# Altium PCB RP2040_PCB.PcbDoc
Units mil, origin at the board's own origin, x right, y up, seen from the top; angles counter-clockwise.
Board outline not stored, 2 copper layers (Top Layer, Bottom Layer); 32 components, 0 nets, 138 pads, 0 vias.
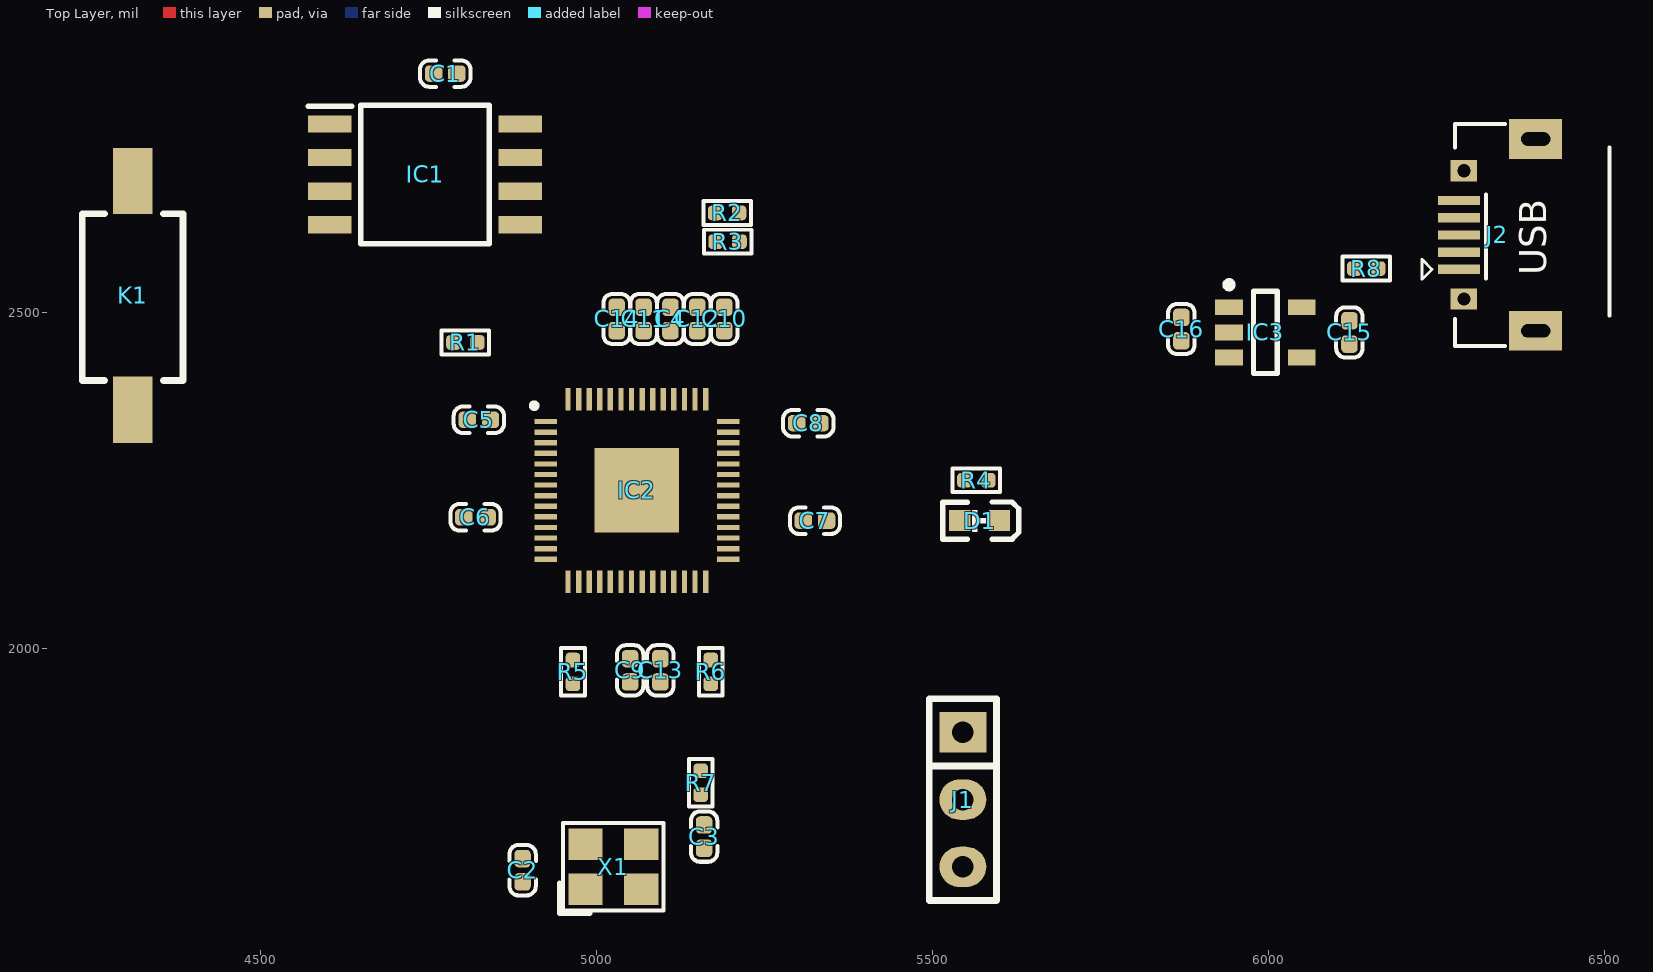
[diagram p0: Top Layer view]
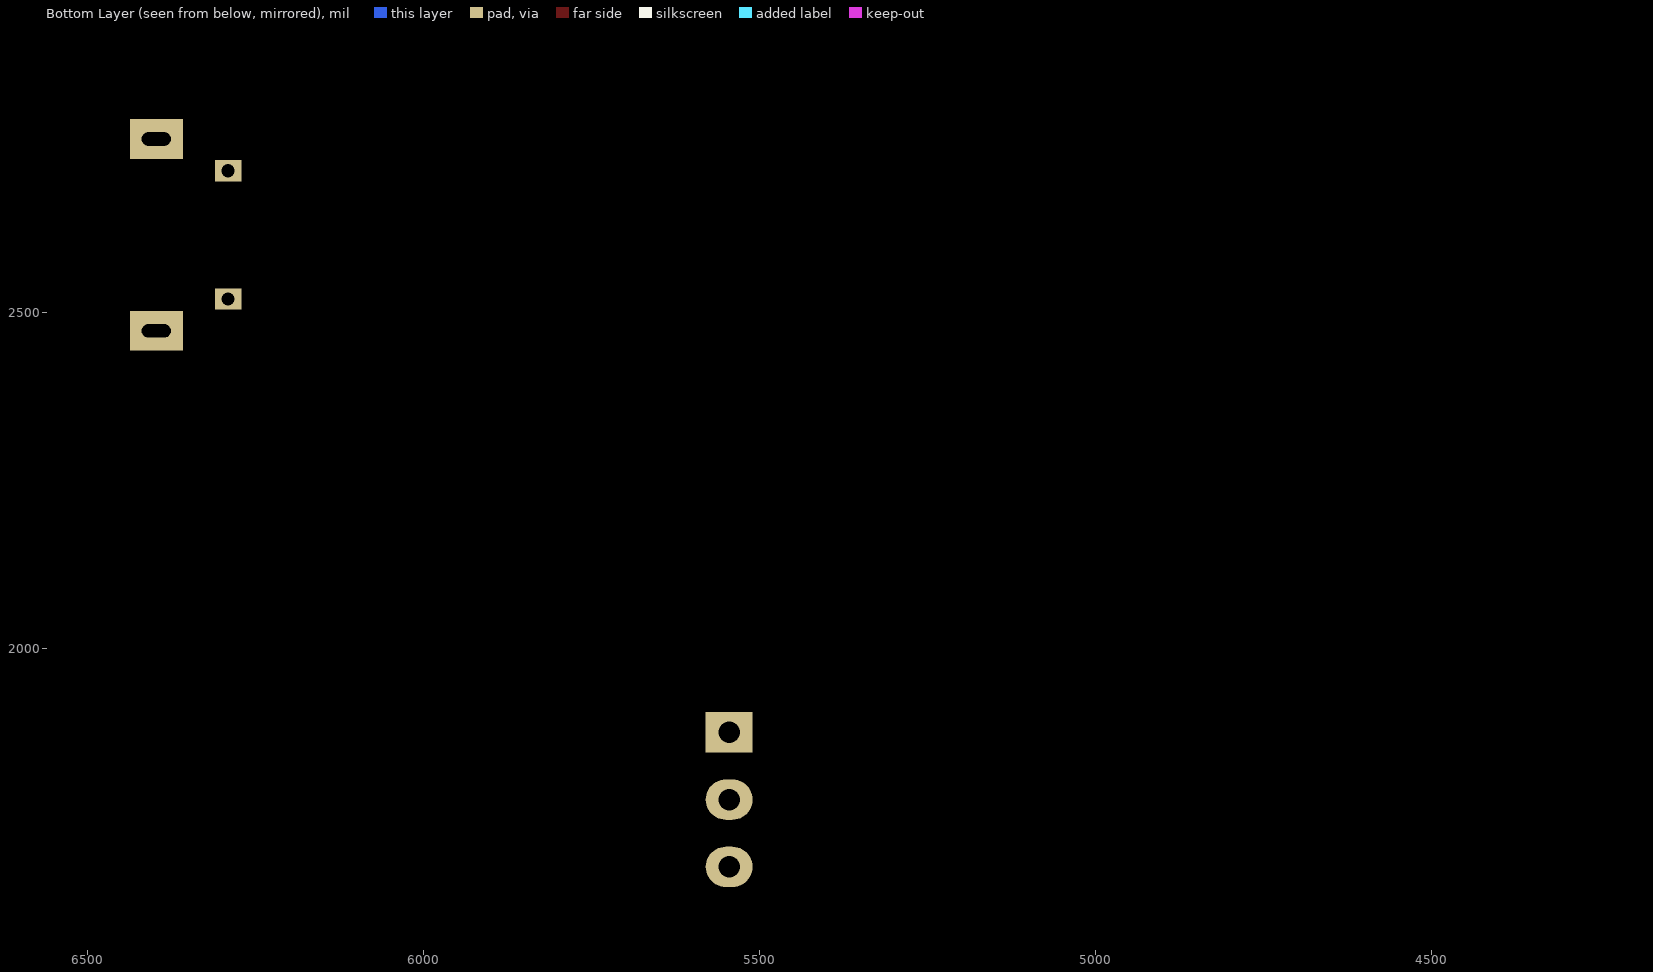
[diagram p1: Bottom Layer view, seen from below]

## Layer stack, top to bottom
Top Solder: solder mask 0.4, Solder Resist, Dk 3.5
Top Layer: signal copper 1.4
Dielectric 1: dielectric 12.6, FR-4, Dk 4.8
Bottom Layer: signal copper 1.4
Bottom Solder: solder mask 0.4, Solder Resist, Dk 3.5

## Components (designator, comment, footprint, x,y, rotation, side; value= is the part's Value field where it differs from the comment)
C1 "100nF" C_0402 4775,2855 r0 top
C2 "20PF" C_0402 4890,1670 r270 top
C3 "20PF" C_0402 5160,1720 r270 top
C4 "1uF" C_0402 5110,2490 r90 top
C5 "100nF" C_0402 4825,2340 r180 top
C6 "100nF" C_0402 4820,2195 r180 top
C7 "100nF" C_0402 5325,2190 r0 top
C8 "100nF" C_0402 5315,2335 r0 top
C9 "100nF" C_0402 5050,1967.32 r270 top
C10 "100nF" C_0402 5190,2490 r90 top
C11 "100nF" C_0402 5070,2490 r90 top
C12 "1uF" C_0402 5150,2490 r90 top
C13 "100nF" C_0402 5095,1967.32 r270 top
C14 "100nF" C_0402 5030,2490 r90 top
C15 "1uF" C_0402 6120,2470 r270 top
C16 "1uF" C_0402 5870,2475 r270 top
D1 "Green" LED-0603-G 5570,2190 r0 top
IC1 "W25Q128JVSIQ" SOIC127P790X216-8N 4745,2705 r0 top
IC2 "RP2040" QFN40P700X700X90-57N-D 5060,2235 r0 top
IC3 "ME6212" SOT23-5 5995,2470 r0 top
J1 "PinHDR_1X3" "Pin HDR1X3/2.54mm-S" 5545,1875 r0 top
J2 "USB2.0_Micro" USB-micro_B 6340,2615 r90 top
K1 "KEY" SMD-3X6X4.3 4310,2355 r90 top
R1 "1kΩ" R_0402 4805,2455 r0 top
R2 "27Ω" R_0402 5194.32,2647.64 r0 top
R3 "27Ω" R_0402 5195,2605 r0 top
R4 "1kΩ" R_0402 5565,2250 r0 top
R5 "0Ω" R_0402 4965,1965 r90 top
R6 "0Ω" R_0402 5170,1965 r90 top
R7 "1kΩ" R_0402 5155,1800 r90 top
R8 "0Ω" R_0402 6145,2565 r0 top
X1 "12Mhz/20pF" XTAL_3225-4P 5025,1675 r0 top

## Footprints (in the part's own frame and the unit in brackets; to place one, negate y for a bottom-side part, rotate by r counter-clockwise, add the part's x,y. Pads: shape width x height; smd on the part's side, far side on the other; paste and mask are expansions set on the pad)
C_0402 [mm] "Chip Capacitor, 2-Leads, Body 1.00x0.50mm, IPC Medium Density"
  rrect50% 0.66x0.62 smd: 1(-0.44,0) 2(0.44,0)
  silkscreen extent -0.95,-0.5 0.95,0.5, body extent -0.52,-0.27 0.53,0.28, height 0.55
LED-0603-G [mm] "Chip Diode, 2-Leads, Body 1.55x0.80mm, IPC Medium Density"
  rect 0.8x0.8 smd: A(-0.75,0) K(0.75,0)
  silkscreen extent -1.4,-0.7 1.48,0.7, body extent -0.8,-0.4 0.8,0.4, height 0.61
"Pin HDR1X3/2.54mm-S" [mil]
  rect 70x60 hole 32: 1(0,0)
  oval 70x60 hole 32: 2(0,-100) 3(0,-200)
  silkscreen extent -50,-250 50,50, body extent -50,-250 50,50, height 336
QFN40P700X700X90-57N-D [mm]
  rect 0.85x0.2 smd: 1(-3.45,2.6) 2(-3.45,2.2) 3(-3.45,1.8) 4(-3.45,1.4) 5(-3.45,1) 6(-3.45,0.6) 7(-3.45,0.2) 8(-3.45,-0.2) 9(-3.45,-0.6) 10(-3.45,-1) 11(-3.45,-1.4) 12(-3.45,-1.8) 13(-3.45,-2.2) 14(-3.45,-2.6) 29(3.45,-2.6) 30(3.45,-2.2) 31(3.45,-1.8) 32(3.45,-1.4) 33(3.45,-1) 34(3.45,-0.6) 35(3.45,-0.2) 36(3.45,0.2) 37(3.45,0.6) 38(3.45,1) 39(3.45,1.4) 40(3.45,1.8) 41(3.45,2.2) 42(3.45,2.6)
  rect 0.2x0.85 smd: 15(-2.6,-3.45) 16(-2.2,-3.45) 17(-1.8,-3.45) 18(-1.4,-3.45) 19(-1,-3.45) 20(-0.6,-3.45) 21(-0.2,-3.45) 22(0.2,-3.45) 23(0.6,-3.45) 24(1,-3.45) 25(1.4,-3.45) 26(1.8,-3.45) 27(2.2,-3.45) 28(2.6,-3.45) 43(2.6,3.45) 44(2.2,3.45) 45(1.8,3.45) 46(1.4,3.45) 47(1,3.45) 48(0.6,3.45) 49(0.2,3.45) 50(-0.2,3.45) 51(-0.6,3.45) 52(-1,3.45) 53(-1.4,3.45) 54(-1.8,3.45) 55(-2.2,3.45) 56(-2.6,3.45)
  rect 3.2x3.2 smd: 57(0,0)
  silkscreen extent -3.97,3.1 -3.78,3.3, body extent -3.55,-3.55 3.55,3.55, height 0.9
R_0402 [mm] "Chip Resistor, 2-Leads, Body 1.00x0.50mm, IPC Medium Density"
  rrect50% 0.55x0.55 smd: 1(-0.45,0) 2(0.45,0)
  silkscreen extent -0.9,-0.45 0.9,0.45, body extent -0.5,-0.27 0.5,0.28, height 0.4
SMD-3X6X4.3 [mm]
  rect 2.5x1.5 smd: 1(0,0) 3(8.636,0)
  silkscreen extent 1.11,-1.9 7.41,1.9, body extent -0.41,-1.78 8.79,1.72, height 4.4
SOIC127P790X216-8N [mm]
  rect 1.65x0.65 smd: 1(-3.6,1.905) 2(-3.6,0.635) 3(-3.6,-0.635) 4(-3.6,-1.905) 5(3.6,-1.905) 6(3.6,-0.635) 7(3.6,0.635) 8(3.6,1.905)
  silkscreen extent -4.43,-2.62 2.42,2.61, body extent -3.95,-2.61 3.95,2.62, height 2.16
SOT23-5 [mm] "SOT23, 5-Leads, Body 2.90x2.80mm, Pitch 0.95mm, IPC Medium Density"
  rect 1.05x0.6 smd: 1(-1.375,0.95) 2(-1.375,0) 3(-1.375,-0.95) 4(1.375,-0.95) 5(1.375,0.95)
  silkscreen extent -1.5,-1.55 0.45,1.92, body extent -1.4,-1.52 1.4,1.48, height 1.15
USB-micro_B [mm]
  rect 1.5x2 hole 0.5 slot 1.1 at 90 deg: 0(-3.625,-1.45) 0(3.625,-1.45)
  rect 0.35x1.6 smd: 1(-1.3,1.45) 2(-0.65,1.45) 3(0,1.45) 4(0.65,1.45) 5(1.3,1.45)
  rect 0.8x1 hole 0.5: 5(-2.425,1.26) 5(2.425,1.26)
  silkscreen extent -4.19,-4.24 4.19,2.85, body extent -4,-4.15 4,1.45, height 2.8
XTAL_3225-4P [mm]
  rect 1.3x1.2 smd: 1(-1.05,-0.85) 2(1.05,-0.85) 3(1.05,0.85) 4(-1.05,0.85)
  silkscreen extent -2.03,-1.75 1.91,1.65, body extent -1.47,-1.27 1.73,1.23, height 0.7

## Part data
C1 C2 C3 C4 C5 C6 C7 C8 C9 C10 C11 C12 C13 C14 C15 C16: library part Cap_Chip, "贴片电容"
D1: library part LED_Chip, "贴片LED"
IC1: "Integrated Circuit", Manufacturer_Name=Winbond, Mouser Part Number=454-W25Q128JVSIQ, Arrow Part Number=W25Q128JVSIQ, Arrow Price/Stock=https://www.arrow.com/en/products/w25q128jvsiq/winbond-electronics?region=nac, Datasheet Link=https://www.winbond.com/resource-files/w25q128jv%20revf%2003272018%20plus.pdf, Height=2.16mm, Manufacturer_Part_Number=W25Q128JVSIQ, Mouser Price/Stock=https://www.mouser.co.uk/ProductDetail/Winbond/W25Q128JVSIQ?qs=qSfuJ%252Bfl%2Fd6tLXvPR4fl9w%3D%3D
IC2: "Integrated Circuit", Manufacturer_Name=RASPBERRY-PI, Datasheet Link=https://datasheets.raspberrypi.org/rp2040/rp2040-datasheet.pdf, Height=0.9mm, Manufacturer_Part_Number=RP2040
IC3: "LDO 线性稳压芯片", ComponentLink1Description=LCSC, ComponentLink1URL=https://item.szlcsc.com/82383.html
J2: "MicroUSB 2.0连接座"
K1: "轻触开关"
R1 R2 R3 R4 R5 R6 R7 R8: library part Res_Chip, "贴片电阻"
X1: library part Crystal_4P, "4脚无源晶振", Manufacturer_Name=YXC扬兴科技, Manufacturer_Part_Number=X322512MSB4SI

## Nets (pads, with @x,y where several pads share a name; then routed paths per layer and width w, separated by ;. In a path a pad name is that pad's centre, name@x,y a point inside that pad or via, vN(x,y) a via of type N, cw(c..) or ccw(c..) an arc to the next point about the centre after c; other vN are vias at no path point)
pads on no net: C1.1 C1.2 C2.1 C2.2 C3.1 C3.2 C4.1 C4.2 C5.1 C5.2 C6.1 C6.2 C7.1 C7.2 C8.1 C8.2 C9.1 C9.2 C10.1 C10.2 C11.1 C11.2 C12.1 C12.2 C13.1 C13.2 C14.1 C14.2 C15.1 C15.2 C16.1 C16.2 D1.A D1.K IC1.1 IC1.2 IC1.3 IC1.4 IC1.5 IC1.6 IC1.7 IC1.8 IC2.1 IC2.2 IC2.3 IC2.4 IC2.5 IC2.6 IC2.7 IC2.8 IC2.9 IC2.10 IC2.11 IC2.12 IC2.13 IC2.14 IC2.15 IC2.16 IC2.17 IC2.18 IC2.19 IC2.20 IC2.21 IC2.22 IC2.23 IC2.24 IC2.25 IC2.26 IC2.27 IC2.28 IC2.29 IC2.30 IC2.31 IC2.32 IC2.33 IC2.34 IC2.35 IC2.36 IC2.37 IC2.38 IC2.39 IC2.40 IC2.41 IC2.42 IC2.43 IC2.44 IC2.45 IC2.46 IC2.47 IC2.48 IC2.49 IC2.50 IC2.51 IC2.52 IC2.53 IC2.54 IC2.55 IC2.56 IC2.57 IC3.1 IC3.2 IC3.3 IC3.4 IC3.5 J1.1 J1.2 J1.3 J2.0 J2.1 J2.2 J2.3 J2.4 J2.5 K1.1 K1.3 R1.1 R1.2 R2.1 R2.2 R3.1 R3.2 R4.1 R4.2 R5.1 R5.2 R6.1 R6.2 R7.1 R7.2 R8.1 R8.2 X1.1 X1.2 X1.3 X1.4

## Text inside footprints (layer, text, board x,y; h text height)
J2: Top Overlay "USB" at 6412.91,2555 h40 r90